# Altium PCB mB_arduino_board - ROUGH (do not use).PcbDoc
Units mil, origin at the board's own origin, x right, y up, seen from the top; angles counter-clockwise.
Board outline 2700 x 2100 mil, 3 copper layers (Top, GND, Bottom), stack 68.228 mil thick; 10 components, 61 nets, 344 pads, 4 vias.
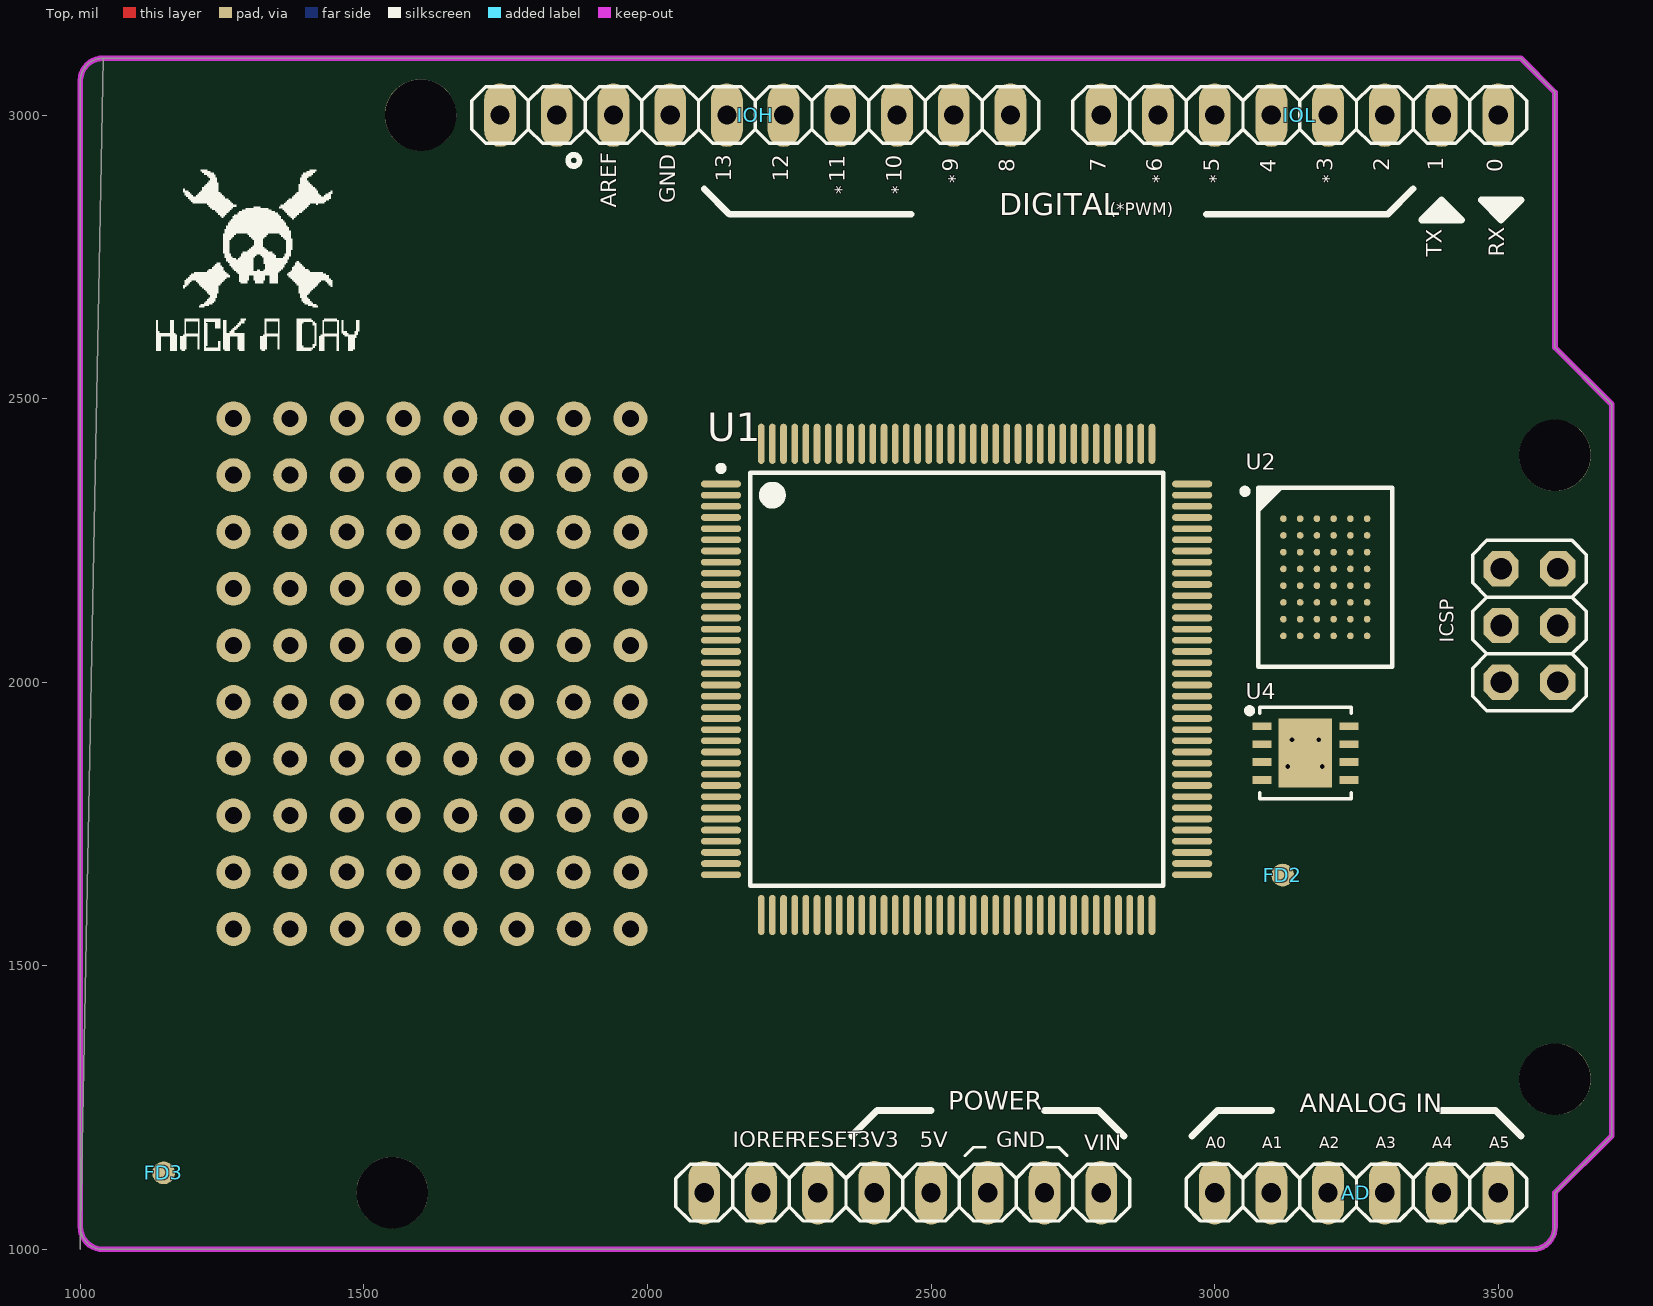
[diagram p0: Top view]
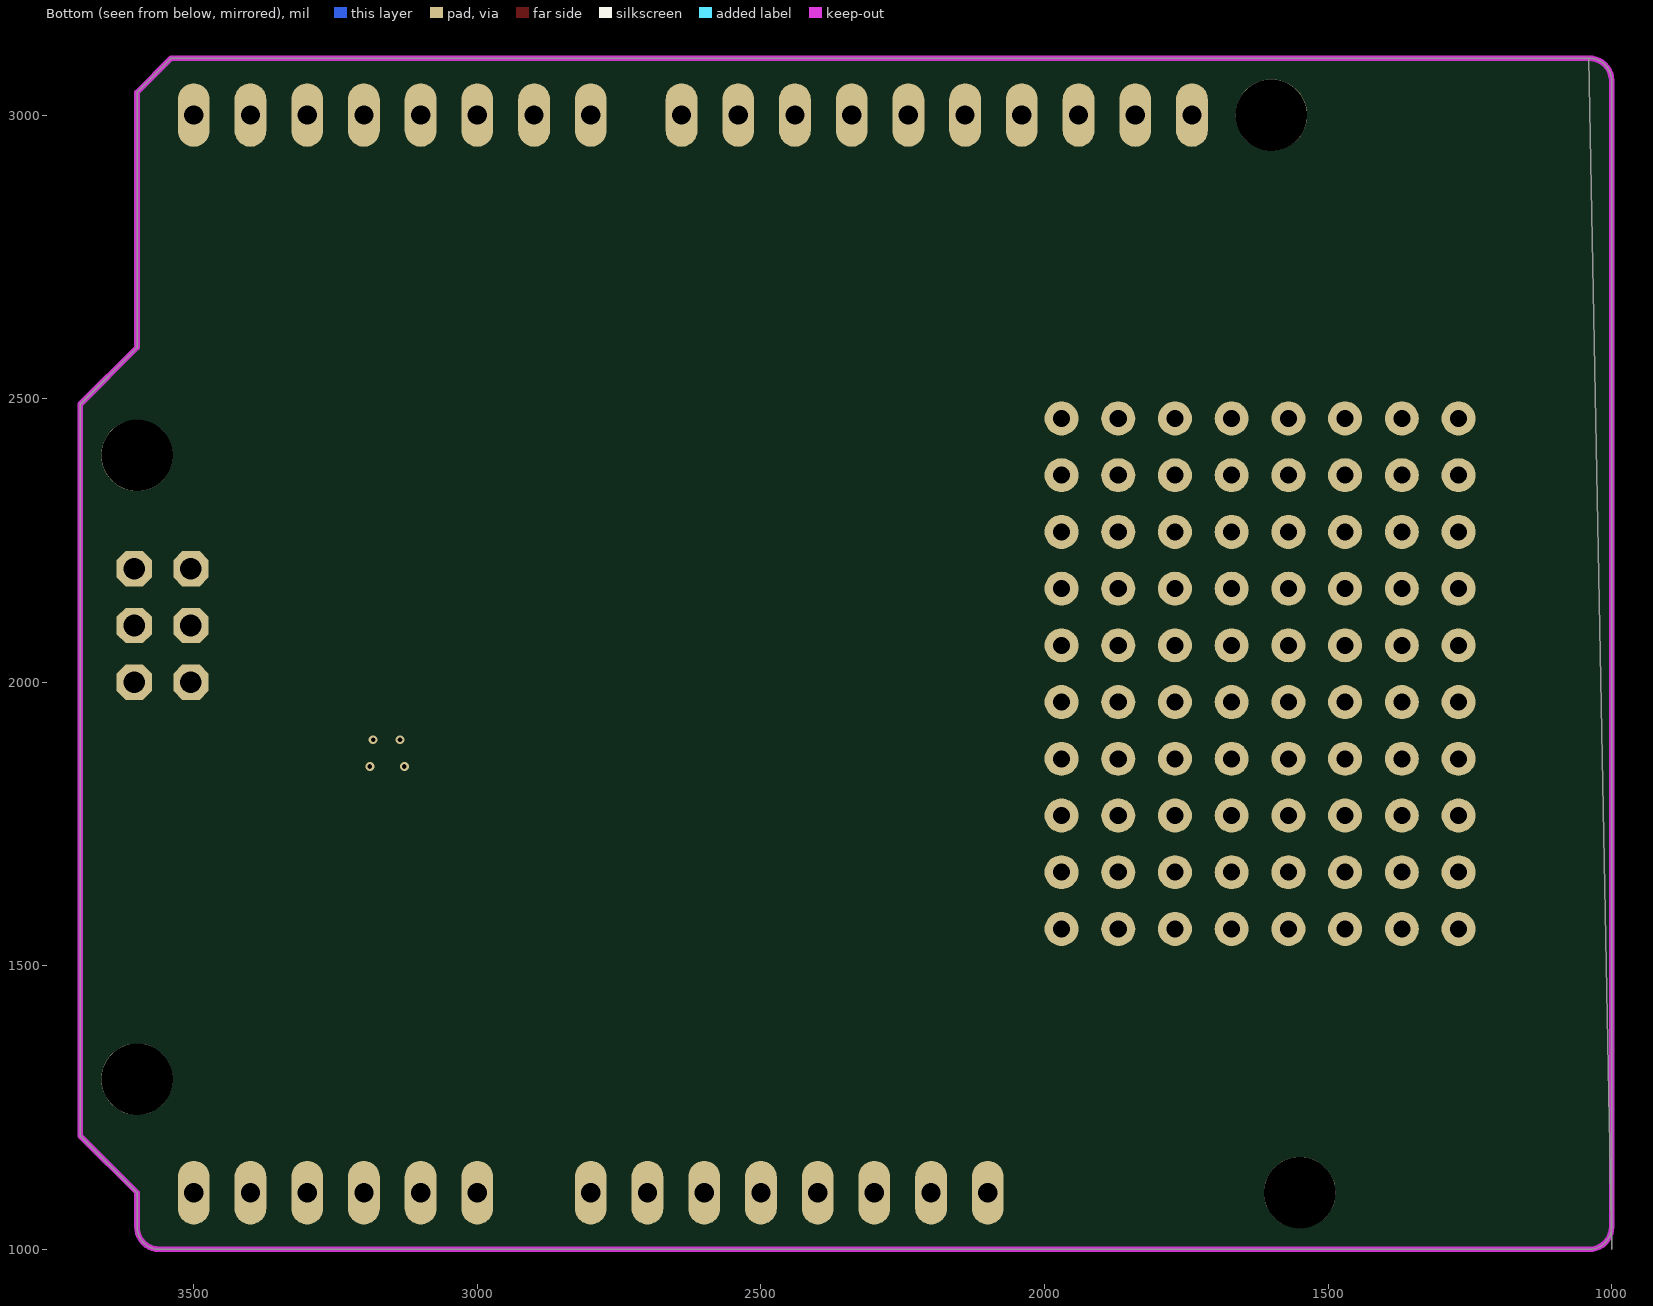
[diagram p1: Bottom view, seen from below]
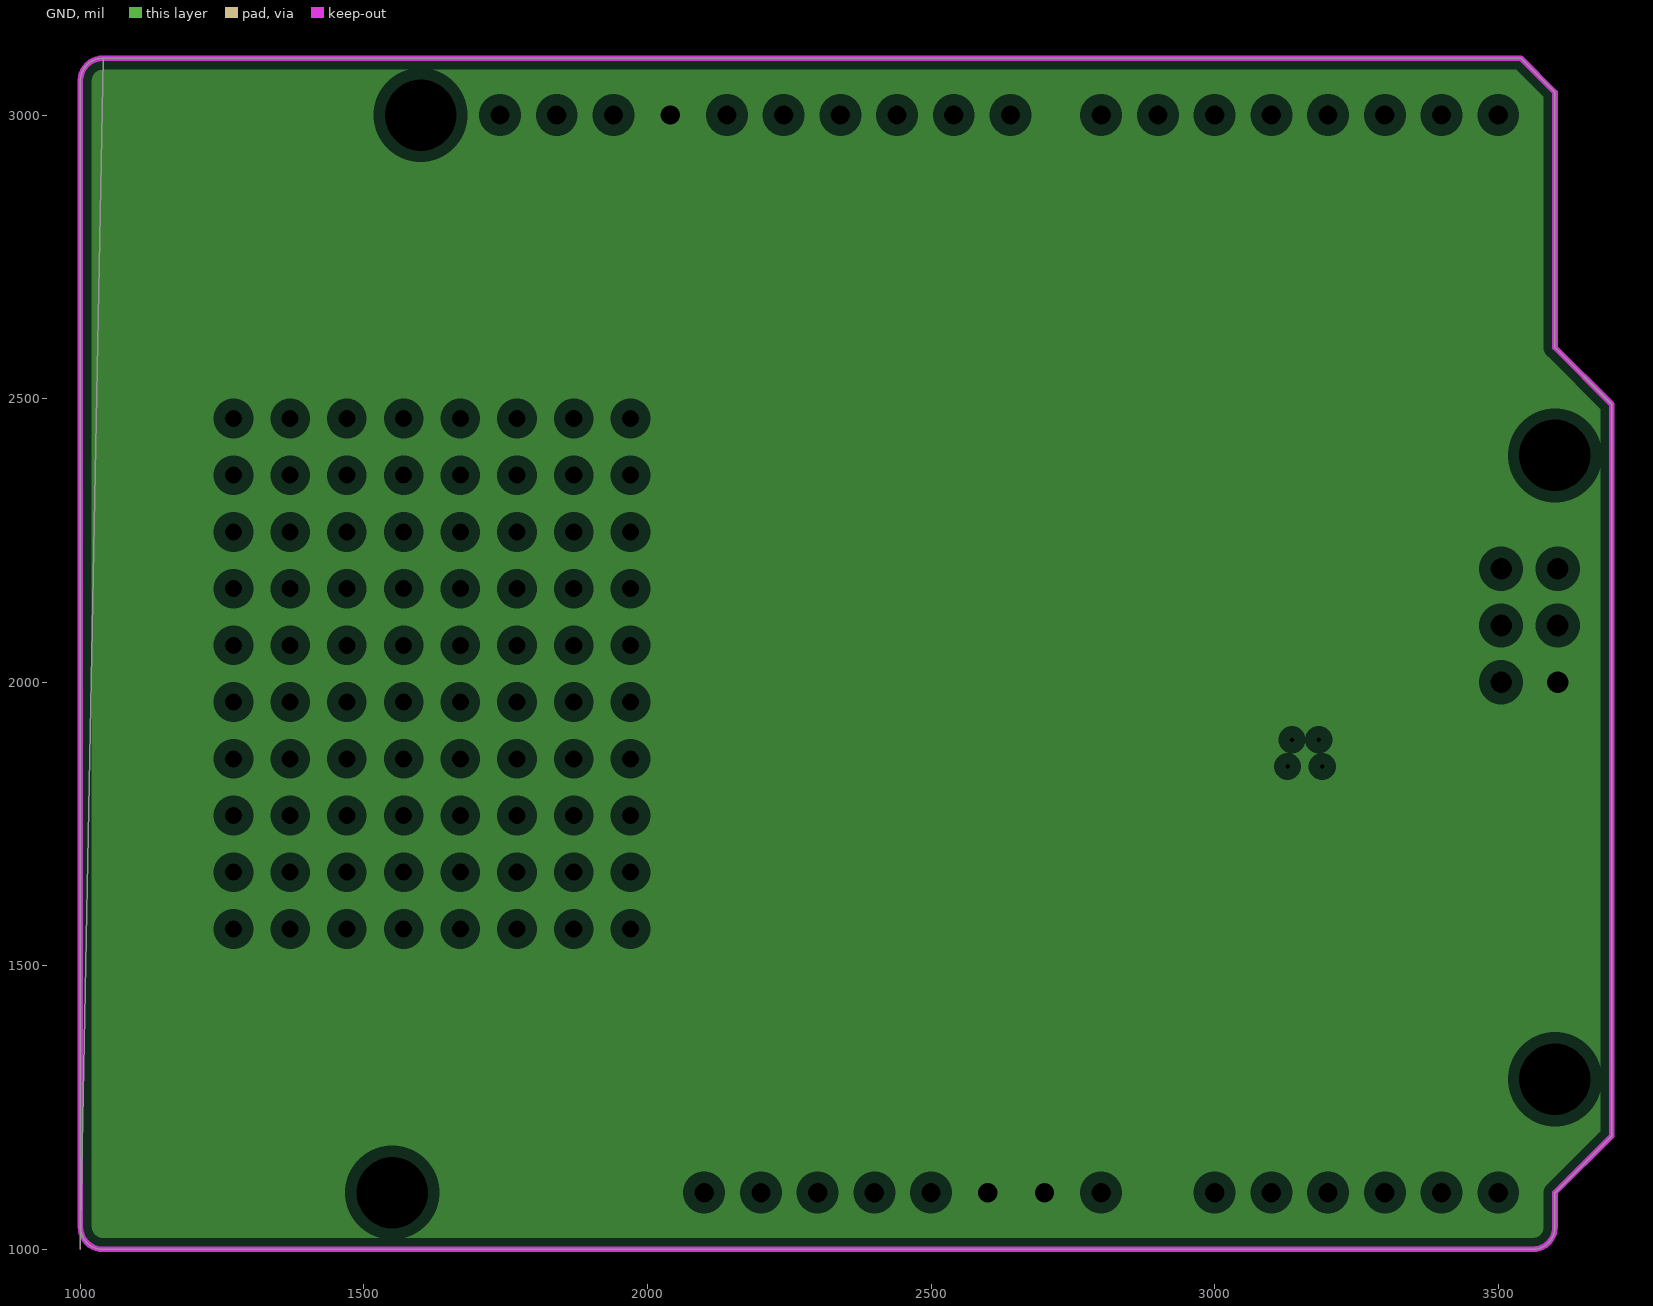
[diagram p2: GND, clearances drawn from the general rule]

## Layer stack, top to bottom
Top Solder: solder mask 0.4, Solder Resist, Dk 3.5
Top: signal copper 1.378
Dielectric 1: core 59.055, FR-4, Dk 4.8
GND: plane copper 1.417, net GND
Dielectric 2: prepreg 5, Dk 4.2
Bottom: signal copper 1.378
Bottom Solder: solder mask 0.4, Solder Resist, Dk 3.5

## Board outline
1040,3100 3540,3100 3600,3040 3600,2590 3700,2490 3700,1200 3600,1100 3600,1040 cw(c3560.5,1039.5) 3561,1000 1040,1000 cw(c1040,1040) 1000,1040 1000,3061 cw(c1039.5,3060.5) 1000,1000

## Design rules (kind name [scope] priority, off if disabled: settings)
Clearance mdViaVia [IsVia vs IsVia] p1: gap=12
Clearance mdPadVia [IsPad vs IsVia] p2: gap=12
Clearance mdPadPad [IsPad vs IsPad] p3: gap=10
Clearance mdWireVia [(InLayerClass('Signal Layers') AND IsTrack) vs IsVia] p4: gap=10
Clearance mdWirePad [(InLayerClass('Signal Layers') AND IsTrack) vs IsPad] p5: gap=10
Clearance mdWireWire [(InLayerClass('Signal Layers') AND IsTrack) vs (InLayerClass('Signal Layers') AND IsTrack)] p6: gap=10
Clearance [All] p7: gap=10
HoleSize [All] p1: absolutevalues=TRUE maxlimit=100000 minlimit=22 maxpercent=80.000 minpercent=20.000
HoleToHoleClearance [All] p1: gap=8 allowstackedmicrovias=TRUE
PasteMaskExpansion [All] p1: expansion=2
PlaneClearance [All] p1: clearance=20
PlaneConnect [All] p1: planeconnectstyle=Relief reliefexpansion=20 reliefentries=4 reliefconductorwidth=10 reliefairgap=10
PolygonConnect ThermalVias [IsVia] p1: connectstyle=Direct reliefconductorwidth=10 reliefentries=4 polygonreliefangle="90 Angle" airgapwidth=10
PolygonConnect [All] p2: connectstyle=Relief reliefconductorwidth=10 reliefentries=4 polygonreliefangle="90 Angle" airgapwidth=10
RoutingVias [All] p1: holewidth=28 width=50 viastyle="Through Hole" minholewidth=28 minwidth=50 maxholewidth=28 maxwidth=50
SilkToSilkClearance [All] p1 off: silktosilkclearance=10
SilkToSolderMaskClearance [IsPad] p1 off: minsilkscreentomaskgap=10 clearancetoexposedcopper=TRUE
SolderMaskExpansion [All] p1: expansion=1
Width [All] p1: maxlimit=100000 minlimit=10 preferedwidth=10
22 further rules are at their usual default settings.

## Components (designator, comment, footprint, x,y, rotation, side; value= is the part's Value field where it differs from the comment)
AD "6x1F-H8.5" 1X06 3250,1100 r0 top
FD2 "" FIDUCIA-MOUNT 3120,1660 r0 top
FD3 "" FIDUCIA-MOUNT 1147,1135 r0 top
ICSP "3x2 M" 2X03 3555,2100 r270 top
IOH "10x1F-H8.5" 1X10@1 2190,3000 r180 top
IOL "8x1F-H8.5" 1X08 3150,3000 r180 top
POWER "8x1F-H8.5" 1X08 2450,1100 r0 top
U1 "Comment" TQG144_N 2545,2005 r0 top
U2 "Comment" ISSI-TF-BGA-48-6000X8000DE 3195,2185 r0 top
U4 "MX25L3206EZUI-12G" MXIC-USON8L 3160,1875 r0 top (schematic designator U1)

## Footprints (in the part's own frame and the unit in brackets; to place one, negate y for a bottom-side part, rotate by r counter-clockwise, add the part's x,y. Pads: shape width x height; smd on the part's side, far side on the other; paste and mask are expansions set on the pad)
1X06 [mil] "1X06"
  oval 56x112 hole 34: 1(-250,0) 2(-150,0) 3(-50,0) 4(50,0) 5(150,0) 6(250,0)
  silkscreen extent -300,-50 300,50
1X08 [mil] "1X08"
  oval 56x112 hole 34: 1(-350,0) 2(-250,0) 3(-150,0) 4(-50,0) 5(50,0) 6(150,0) 7(250,0) 8(350,0)
  silkscreen extent -400,-50 400,50
1X10@1 [mil] "1X10@1"
  oval 56x112 hole 34: 1(-450,0) 2(-350,0) 3(-250,0) 4(-150,0) 5(-50,0) 6(50,0) 7(150,0) 8(250,0) 9(350,0) 10(450,0)
  silkscreen extent -500,-50 500,50
2X03 [mil] "2X03"
  oct 62x62 hole 38: 1(-100,-50) 2(-100,50) 3(0,-50) 4(0,50) 5(100,-50) 6(100,50)
  silkscreen extent -150,-100 150,100
FIDUCIA-MOUNT [mil] "FIDUCIA-MOUNT"
  rrect100% 40x40 smd: P$1(0,0)
ISSI-TF-BGA-48-6000X8000DE [mm] "BGA, 48-Balls, Body 8x6mm, Pitch 0.75mm"
  round 0.3 smd: A1(-1.875,2.625) A2(-1.125,2.625) A3(-0.375,2.625) A4(0.375,2.625) A5(1.125,2.625) A6(1.875,2.625) B1(-1.875,1.875) B2(-1.125,1.875) B3(-0.375,1.875) B4(0.375,1.875) B5(1.125,1.875) B6(1.875,1.875) C1(-1.875,1.125) C2(-1.125,1.125) C3(-0.375,1.125) C4(0.375,1.125) C5(1.125,1.125) C6(1.875,1.125) D1(-1.875,0.375) D2(-1.125,0.375) D3(-0.375,0.375) D4(0.375,0.375) D5(1.125,0.375) D6(1.875,0.375) E1(-1.875,-0.375) E2(-1.125,-0.375) E3(-0.375,-0.375) E4(0.375,-0.375) E5(1.125,-0.375) E6(1.875,-0.375) F1(-1.875,-1.125) F2(-1.125,-1.125) F3(-0.375,-1.125) F4(0.375,-1.125) F5(1.125,-1.125) F6(1.875,-1.125) G1(-1.875,-1.875) G2(-1.125,-1.875) G3(-0.375,-1.875) G4(0.375,-1.875) G5(1.125,-1.875) G6(1.875,-1.875) H1(-1.875,-2.625) H2(-1.125,-2.625) H3(-0.375,-2.625) H4(0.375,-2.625) H5(1.125,-2.625) H6(1.875,-2.625)
  silkscreen extent -3.72,-4 3,4, body extent -3,-4 3,4, height 1.2
MXIC-USON8L [mm] "USON, 0.8mm Pitch,  4.0 mm x 4.0 mm Body Size, 8 Pins"
  rect 0.85x0.35 smd: 1(-1.95,1.2) 2(-1.95,0.4) 3(-1.95,-0.4) 4(-1.95,-1.2) 5(1.95,-1.2) 6(1.95,-0.4) 7(1.95,0.4) 8(1.95,1.2)
  rect 2.4x3.1 smd: 9(0,0)
  silkscreen extent -2.6,-2.05 2.05,2.05, body extent -2.05,-2.05 2.05,2.05, height 0.6
TQG144_N [mm] "Thin QFP, 144-Leads, Body 20x20mm, Pitch 0.5mm, IPC Medium Density"
  oval 1.8x0.3 smd: 1(-10.55,8.75) 2(-10.55,8.25) 3(-10.55,7.75) 4(-10.55,7.25) 5(-10.55,6.75) 6(-10.55,6.25) 7(-10.55,5.75) 8(-10.55,5.25) 9(-10.55,4.75) 10(-10.55,4.25) 11(-10.55,3.75) 12(-10.55,3.25) 13(-10.55,2.75) 14(-10.55,2.25) 15(-10.55,1.75) 16(-10.55,1.25) 17(-10.55,0.75) 18(-10.55,0.25) 19(-10.55,-0.25) 20(-10.55,-0.75) 21(-10.55,-1.25) 22(-10.55,-1.75) 23(-10.55,-2.25) 24(-10.55,-2.75) 25(-10.55,-3.25) 26(-10.55,-3.75) 27(-10.55,-4.25) 28(-10.55,-4.75) 29(-10.55,-5.25) 30(-10.55,-5.75) 31(-10.55,-6.25) 32(-10.55,-6.75) 33(-10.55,-7.25) 34(-10.55,-7.75) 35(-10.55,-8.25) 36(-10.55,-8.75) 73(10.55,-8.75) 74(10.55,-8.25) 75(10.55,-7.75) 76(10.55,-7.25) 77(10.55,-6.75) 78(10.55,-6.25) 79(10.55,-5.75) 80(10.55,-5.25) 81(10.55,-4.75) 82(10.55,-4.25) 83(10.55,-3.75) 84(10.55,-3.25) 85(10.55,-2.75) 86(10.55,-2.25) 87(10.55,-1.75) 88(10.55,-1.25) 89(10.55,-0.75) 90(10.55,-0.25) 91(10.55,0.25) 92(10.55,0.75) 93(10.55,1.25) 94(10.55,1.75) 95(10.55,2.25) 96(10.55,2.75) 97(10.55,3.25) 98(10.55,3.75) 99(10.55,4.25) 100(10.55,4.75) 101(10.55,5.25) 102(10.55,5.75) 103(10.55,6.25) 104(10.55,6.75) 105(10.55,7.25) 106(10.55,7.75) 107(10.55,8.25) 108(10.55,8.75)
  oval 0.3x1.8 smd: 37(-8.75,-10.55) 38(-8.25,-10.55) 39(-7.75,-10.55) 40(-7.25,-10.55) 41(-6.75,-10.55) 42(-6.25,-10.55) 43(-5.75,-10.55) 44(-5.25,-10.55) 45(-4.75,-10.55) 46(-4.25,-10.55) 47(-3.75,-10.55) 48(-3.25,-10.55) 49(-2.75,-10.55) 50(-2.25,-10.55) 51(-1.75,-10.55) 52(-1.25,-10.55) 53(-0.75,-10.55) 54(-0.25,-10.55) 55(0.25,-10.55) 56(0.75,-10.55) 57(1.25,-10.55) 58(1.75,-10.55) 59(2.25,-10.55) 60(2.75,-10.55) 61(3.25,-10.55) 62(3.75,-10.55) 63(4.25,-10.55) 64(4.75,-10.55) 65(5.25,-10.55) 66(5.75,-10.55) 67(6.25,-10.55) 68(6.75,-10.55) 69(7.25,-10.55) 70(7.75,-10.55) 71(8.25,-10.55) 72(8.75,-10.55) 109(8.75,10.55) 110(8.25,10.55) 111(7.75,10.55) 112(7.25,10.55) 113(6.75,10.55) 114(6.25,10.55) 115(5.75,10.55) 116(5.25,10.55) 117(4.75,10.55) 118(4.25,10.55) 119(3.75,10.55) 120(3.25,10.55) 121(2.75,10.55) 122(2.25,10.55) 123(1.75,10.55) 124(1.25,10.55) 125(0.75,10.55) 126(0.25,10.55) 127(-0.25,10.55) 128(-0.75,10.55) 129(-1.25,10.55) 130(-1.75,10.55) 131(-2.25,10.55) 132(-2.75,10.55) 133(-3.25,10.55) 134(-3.75,10.55) 135(-4.25,10.55) 136(-4.75,10.55) 137(-5.25,10.55) 138(-5.75,10.55) 139(-6.25,10.55) 140(-6.75,10.55) 141(-7.25,10.55) 142(-7.75,10.55) 143(-8.25,10.55) 144(-8.75,10.55)
  silkscreen extent -10.67,-9.25 9.25,9.57, body extent -10,-10 10,10, height 1.6

## Part data
AD: library part 1X06
FD2 FD3: library part FIDUCIA-MOUNT
ICSP: library part 2X03
IOH: library part 1X10@1
IOL POWER: library part 1X08
U4: "FLASH SER 3V 32MB 86MHZ 8USON"

## Free pads (board coordinates)
  round 60 hole 30: 0(1270,1565) 0(1270,1565) 0(1370,1565) 0(1470,1565) 0(1570,1565) 0(1670,1565) 0(1770,1565) 0(1870,1565) 0(1970,1565) 25(1270,1565) 25(1270,1565) 25(1370,1565) 25(1470,1565) 25(1570,1565) 25(1670,1565) 25(1770,1565) 25(1870,1565) 25(1970,1565) 26(1270,1665) 26(1270,1665) 26(1370,1665) 26(1470,1665) 26(1570,1665) 26(1670,1665) 26(1770,1665) 26(1870,1665) 26(1970,1665) 27(1270,1765) 27(1270,1765) 27(1370,1765) 27(1470,1765) 27(1570,1765) 27(1670,1765) 27(1770,1765) 27(1870,1765) 27(1970,1765) 28(1270,1865) 28(1270,1865) 28(1370,1865) 28(1470,1865) 28(1570,1865) 28(1670,1865) 28(1770,1865) 28(1870,1865) 28(1970,1865) 29(1270,1965) 29(1270,1965) 29(1370,1965) 29(1470,1965) 29(1570,1965) 29(1670,1965) 29(1770,1965) 29(1870,1965) 29(1970,1965) 30(1270,2065) 30(1270,2065) 30(1370,2065) 30(1470,2065) 30(1570,2065) 30(1670,2065) 30(1770,2065) 30(1870,2065) 30(1970,2065) 31(1270,2165) 31(1270,2165) 31(1370,2165) 31(1470,2165) 31(1570,2165) 31(1670,2165) 31(1770,2165) 31(1870,2165) 31(1970,2165) 32(1270,2265) 32(1270,2265) 32(1370,2265) 32(1470,2265) 32(1570,2265) 32(1670,2265) 32(1770,2265) 32(1870,2265) 32(1970,2265) 33(1270,2365) 33(1270,2365) 33(1370,2365) 33(1470,2365) 33(1570,2365) 33(1670,2365) 33(1770,2365) 33(1870,2365) 33(1970,2365) 34(1270,2465) 34(1270,2465) 34(1370,2465) 34(1470,2465) 34(1570,2465) 34(1670,2465) 34(1770,2465) 34(1870,2465) 34(1970,2465)
  round 126 hole 126: 1(1550,1100) 1(1600,3000) 1(3600,1300) 1(3600,2400)

## Via types
v1: diameter 15.7, hole 8, Top to Bottom, tented both sides, 4 vias

## Nets (pads, with @x,y where several pads share a name; then routed paths per layer and width w, separated by ;. In a path a pad name is that pad's centre, name@x,y a point inside that pad or via, vN(x,y) a via of type N, cw(c..) or ccw(c..) an arc to the next point about the centre after c; other vN are vias at no path point)
5-GND: 
+3V3: POWER.4
+5V: ICSP.2 POWER.2 POWER.5
AD0: AD.1
AD1: AD.2
AD2: AD.3
AD3: AD.4
AD4/SDA: AD.5 IOH.9
AD5/SCL: AD.6 IOH.10
AREF: IOH.8
CMP: 
D+: 
D-: 
DTR: 
GATE_CMD: 
GND: ICSP.6 IOH.7 POWER.6 POWER.7
IO0: IOL.1
IO1: IOL.2
IO2: IOL.3
IO3: IOL.4
IO4: IOL.5
IO5: IOL.6
IO6: IOL.7
IO7: IOL.8
IO8: IOH.1
IO9: IOH.2
L13: 
M8RXD: 
M8TXD: 
MISO: ICSP.1 IOH.5
MISO2: 
MOSI: ICSP.4 IOH.4
MOSI2: 
N$1: 
N$3: 
N$35: 
N$36: 
PB4: 
PB5: 
PB6: 
PB7: 
PWRIN: 
RD+: 
RD-: 
RESET: ICSP.5 POWER.3
RESET2: 
RXLED: 
SCK: ICSP.3 IOH.6
SCK2: 
SS: IOH.3
TP_VUCAP: 
TXLED: 
UGND: 
USBVCC: 
USHIELD: 
VIN: POWER.8
XT1: 
XT2: 
XTAL1: 
XTAL2: 
XUSB: 
pads on no net: FD2.P$1 FD3.P$1 POWER.1 U1.1 U1.2 U1.3 U1.4 U1.5 U1.6 U1.7 U1.8 U1.9 U1.10 U1.11 U1.12 U1.13 U1.14 U1.15 U1.16 U1.17 U1.18 U1.19 U1.20 U1.21 U1.22 U1.23 U1.24 U1.25 U1.26 U1.27 U1.28 U1.29 U1.30 U1.31 U1.32 U1.33 U1.34 U1.35 U1.36 U1.37 U1.38 U1.39 U1.40 U1.41 U1.42 U1.43 U1.44 U1.45 U1.46 U1.47 U1.48 U1.49 U1.50 U1.51 U1.52 U1.53 U1.54 U1.55 U1.56 U1.57 U1.58 U1.59 U1.60 U1.61 U1.62 U1.63 U1.64 U1.65 U1.66 U1.67 U1.68 U1.69 U1.70 U1.71 U1.72 U1.73 U1.74 U1.75 U1.76 U1.77 U1.78 U1.79 U1.80 U1.81 U1.82 U1.83 U1.84 U1.85 U1.86 U1.87 U1.88 U1.89 U1.90 U1.91 U1.92 U1.93 U1.94 U1.95 U1.96 U1.97 U1.98 U1.99 U1.100 U1.101 U1.102 U1.103 U1.104 U1.105 U1.106 U1.107 U1.108 U1.109 U1.110 U1.111 U1.112 U1.113 U1.114 U1.115 U1.116 U1.117 U1.118 U1.119 U1.120 U1.121 U1.122 U1.123 U1.124 U1.125 U1.126 U1.127 U1.128 U1.129 U1.130 U1.131 U1.132 U1.133 U1.134 U1.135 U1.136 U1.137 U1.138 U1.139 U1.140 U1.141 U1.142 U1.143 U1.144 U2.A1 U2.A2 U2.A3 U2.A4 U2.A5 U2.A6 U2.B1 U2.B2 U2.B3 U2.B4 U2.B5 U2.B6 U2.C1 U2.C2 U2.C3 U2.C4 U2.C5 U2.C6 U2.D1 U2.D2 U2.D3 U2.D4 U2.D5 U2.D6 U2.E1 U2.E2 U2.E3 U2.E4 U2.E5 U2.E6 U2.F1 U2.F2 U2.F3 U2.F4 U2.F5 U2.F6 U2.G1 U2.G2 U2.G3 U2.G4 U2.G5 U2.G6 U2.H1 U2.H2 U2.H3 U2.H4 U2.H5 U2.H6 U4.1 U4.2 U4.3 U4.4 U4.5 U4.6 U4.7 U4.8 U4.9
copper on no net:
  other v1: 3128.52,1851.39 3189.54,1851.39 3136.38,1898.62 3183.62,1898.62

## Polygon pours and split planes (outlines as drawn)
GND on GND (split plane): 1039.75,3079.93 1040,3079.9 3531.68,3079.9 3579.9,3031.68 3579.9,2590 3580.29,2586.08 3581.43,2582.31 3583.29,2578.83 3585.79,2575.79 3679.9,2481.68 3679.9,1208.32 3585.79,1114.21 3583.29,1111.17 3581.43,1107.69 3580.29,1103.92 3579.9,1100 3579.9,1040 3579.93,1039.75 3579.97,1039.27 3579.62,1035.7 3578.51,1032.04 3576.71,1028.67 3574.29,1025.71 3571.33,1023.29 3567.96,1021.49 3564.3,1020.38 3561.23,1020.07 3561,1020.1 1040,1020.1 1039.53,1020.05 1036.1,1020.39 1032.35,1021.53 1028.89,1023.37 1025.86,1025.86 1023.37,1028.89 1021.53,1032.35 1020.39,1036.1 1020.05,1039.53 1020.1,1040 1020.1,3061 1020.07,3061.23 1020.38,3064.3 1021.49,3067.96 1023.29,3071.33 1025.71,3074.29 1028.67,3076.71 1032.04,3078.51 1035.7,3079.62 1039.27,3079.97

## Keep-outs
Keep-Out Layer:
  lines w10: 1000,1040 ccw(c1040,1040) 1040,1000 3561,1000 ccw(c3560.5,1039.5) 3600,1040 3600,1100 3700,1200 3700,2490 3600,2590 3600,3040 3540,3100 1040,3100 ccw(c1039.5,3060.5) 1000,3061 1000,1040

## Silkscreen, mask and mechanical layers (free items; w line width, h text height)
Top Overlay:
  drawing of 45 lines, arcs and shapes, not listed
  text "1" at 3412.39,2901.66 h47.6 r90
  text "3" at 3217.58,2900.56 h47.6 r90
  text "2" at 3317.58,2900.56 h47.6 r90
  text "9" at 2557.58,2899.77 h47.6 r90
  text "7" at 2817.58,2899.9 h47.6 r90
  text "6" at 2917.58,2899.82 h47.6 r90
  text "5" at 3017.58,2900.43 h47.6 r90
  text "8" at 2657.58,2899.38 h47.6 r90
  text "0" at 3517.58,2898.94 h47.6 r90
  text "4" at 3117.58,2898.28 h47.6 r90
  text "13" at 2157.58,2882.17 h47.6 r90
  text "12" at 2257.58,2882 h47.6 r90
  text "11" at 2357.58,2881.91 h47.6 r90
  text "10" at 2457.58,2881.16 h47.6 r90
  text "*" at 2560,2880 h37.4 r90
  text "*" at 2920,2880 h37.4 r90
  text "*" at 3020,2880 h37.4 r90
  text "*" at 3220,2880 h37.4 r90
  text "*" at 2360,2860 h37.4 r90
  text "*" at 2460,2860 h37.4 r90
  text "GND" at 2058.58,2844.73 h47.6 r90
  text "AREF" at 1954.58,2836.63 h47.6 r90
  text "(*PWM)" at 2815,2815 h37.4
  text "DIGITAL" at 2620,2810 h66.1
  text "TX" at 3410,2750 h47.6 r90
  text "RX" at 3520,2750 h47.6 r90
  text "ANALOG IN" at 3150,1230 h56.1
  text "A0" at 2984,1171 h34
  text "A1" at 3084,1171 h34
  text "A2" at 3184,1171 h34
  text "A3" at 3284,1171 h34
  text "A4" at 3384,1171 h34
  text "A5" at 3484,1171 h34
  text "IOREF" at 2150,1170 h47.6
  text "RESET" at 2255,1170 h47.6
  text "3V3" at 2370,1170 h47.6
  text "5V" at 2480,1170 h47.6
  text "GND" at 2615,1170 h47.6
  text "VIN" at 2770,1165 h47.6
Dimension:
  lines w10: 1000,1040 ccw(c1040,1040) 1040,1000 3561,1000 ccw(c3560.5,1039.5) 3600,1040 3600,1100 3700,1200 3700,2490 3600,2590 3600,3040 3540,3100 1040,3100 ccw(c1039.5,3060.5) 1000,3061 1000,1040
Unrouted:
  lines w0: 1160,1969 1176,1965 ; 1257,2775 1355,2685
214bmp:
  text "D:/SmartProjects/Snc/a4_bn_logo2.bmp" at 1000,997.5 h0.85